# EAGLE board mbhp_dio_matrix_v1 (EAGLE 6.2)
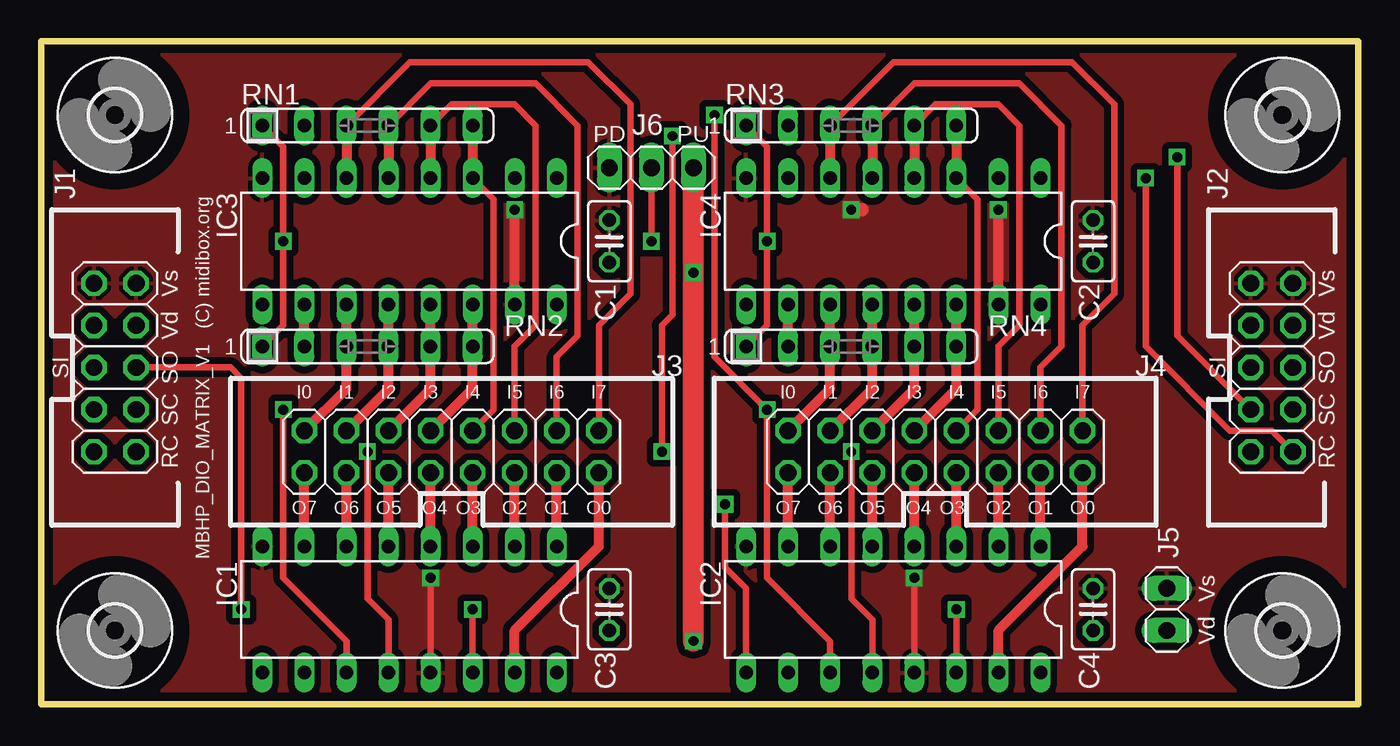
[diagram p0: board, top side]
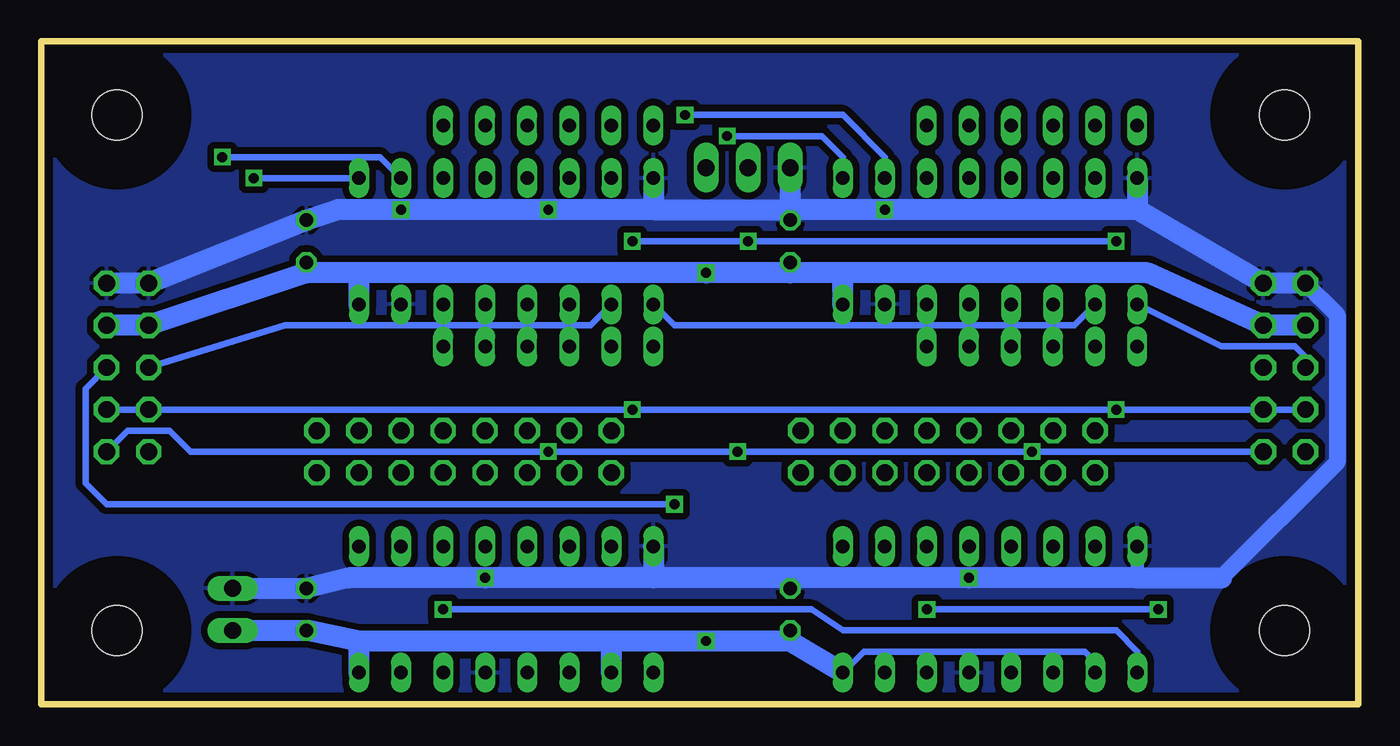
[diagram p1: board, bottom side, seen from below]

Size 79.5 x 40 mm. Coordinates in mm from the lower left corner, seen from the top.
Outline: 0,0 0,40 79.5,40 79.5,0 0,0
Copper layers (1*16): Top 0.035mm / dielectric 1.5mm / Bottom 0.035mm
Design rules: minimum track width 8mil, minimum drill 0.6mm, track to track 8mil, track to pad 8mil, pad to pad 8mil, via to via 8mil, smd to smd 0mil, copper to edge 20mil, drill to drill 10mil, minimum pad ring 8mil, minimum via ring 8mil, stop-mask expansion 0mil, vias tented up to drill 0mil, thermal gap 10mil

## Footprints (pad centres in the part's own frame; a part is rotated, then mirrored left to right if it is on the bottom)
C025-025X050 = drill 0.813 octagon: 1 -1.27,0; 2 1.27,0
3,0 = hole 3: 0,0
DIL16 = drill 0.813 long: 1 -8.89,-3.81; 2 -6.35,-3.81; 3 -3.81,-3.81; 4 -1.27,-3.81; 5 1.27,-3.81; 6 3.81,-3.81; 7 6.35,-3.81; 8 8.89,-3.81; 9 8.89,3.81; 10 6.35,3.81; 11 3.81,3.81; 12 1.27,3.81; 13 -1.27,3.81; 14 -3.81,3.81; 15 -6.35,3.81; 16 -8.89,3.81
2X05 = drill 1.016 octagon: 1 -5.08,-1.27; 2 -5.08,1.27; 3 -2.54,-1.27; 4 -2.54,1.27; 5 0,-1.27; 6 0,1.27; 7 2.54,-1.27; 8 2.54,1.27; 9 5.08,-1.27; 10 5.08,1.27
2X08 = drill 1.016 octagon: 1 -8.89,-1.27; 2 -8.89,1.27; 3 -6.35,-1.27; 4 -6.35,1.27; 5 -3.81,-1.27; 6 -3.81,1.27; 7 -1.27,-1.27; 8 -1.27,1.27; 9 1.27,-1.27; 10 1.27,1.27; 11 3.81,-1.27; 12 3.81,1.27; 13 6.35,-1.27; 14 6.35,1.27; 15 8.89,-1.27; 16 8.89,1.27
1X02 = drill 1.016 long: 1 -1.27,0; 2 1.27,0
1X03 = drill 1.016 long: 1 -2.54,0; 2 0,0; 3 2.54,0
SIL6 = drill 0.813 long: 1 -6.35,0; 2 -3.81,0; 3 -1.27,0; 4 1.27,0; 5 3.81,0; 6 6.35,0

## Placement (x,y rotation side)
C1  100nF  [C025-025X050]  34.29,27.94 90 top
C2  100nF  [C025-025X050]  63.5,27.94 90 top
C3  100nF  [C025-025X050]  34.29,5.71 90 top
C4  100nF  [C025-025X050]  63.5,5.71 90 top
E$1  [3,0]  4.45,35.56 0 top
E$2  [3,0]  74.93,35.56 0 top
E$3  [3,0]  74.93,4.45 0 top
E$4  [3,0]  4.45,4.45 0 top
IC1  74HC595  [DIL16]  22.23,5.71 180 top
IC2  74HC595  [DIL16]  51.44,5.71 180 top
IC3  74HC165  [DIL16]  22.23,27.94 180 top
IC4  74HC165  [DIL16]  51.44,27.94 180 top
J1  [2X05]  4.45,20.32 270 top
J2  [2X05]  74.3,20.32 270 top
J3  [2X08]  24.77,15.24 0 top
J4  [2X08]  53.98,15.24 0 top
J5  [1X02]  67.94,5.71 90 top
J6  [1X03]  36.83,32.38 180 top
RN1  5x10k  [SIL6]  19.68,34.92 0 top
RN2  5x10k  [SIL6]  19.68,21.59 0 top
RN3  5x10k  [SIL6]  48.9,34.92 0 top
RN4  5x10k  [SIL6]  48.9,21.59 0 top

## Library data of the parts
C1-C4 = resistor
E$1-E$4 = holes
IC1-IC4 = 74xx-eu
J1-J6 = pinhead
RN1-RN4 = resistor-sil

## Nets
GND: C1.2 C2.2 C3.2 C4.2 IC1.8 IC1.13 IC2.8 IC2.13 IC3.8 IC3.15 IC4.8 IC4.15 J1.1 J1.2 J2.1 J2.2 J5.2 J6.3
RC: IC1.12 IC2.12 IC3.1 IC4.1 J1.10 J2.10
S$1: J6.2 RN1.1 RN2.1 RN3.1 RN4.1
S$2: IC1.9 IC2.14
S$3: IC3.11 J3.2 RN2.3
S$4: IC3.12 J3.4 RN2.4
S$5: IC3.13 J3.6 RN2.5
S$6: IC3.14 J3.8 RN2.6
S$7: IC3.3 J3.10 RN1.6
S$8: IC3.4 J3.12 RN1.5
S$9: IC3.5 J3.14 RN1.4
S$10: IC3.6 J3.16 RN1.3
S$11: IC4.11 J4.2 RN4.3
S$12: IC4.12 J4.4 RN4.4
S$13: IC4.13 J4.6 RN4.5
S$14: IC4.14 J4.8 RN4.6
S$15: IC4.3 J4.10 RN3.6
S$16: IC4.4 J4.12 RN3.5
S$17: IC4.5 J4.14 RN3.4
S$18: IC4.6 J4.16 RN3.3
S$19: IC3.10 IC4.9 RN2.2
S$20: IC4.10 J2.5 RN4.2
S$24: IC1.7 J3.1
S$25: IC1.6 J3.3
S$26: IC1.5 J3.5
S$27: IC1.4 J3.7
S$28: IC1.3 J3.9
S$29: IC1.2 J3.11
S$30: IC1.1 J3.13
S$31: IC1.15 J3.15
S$32: IC2.7 J4.1
S$33: IC2.6 J4.3
S$34: IC2.5 J4.5
S$35: IC2.4 J4.7
S$36: IC2.3 J4.9
S$37: IC2.2 J4.11
S$38: IC2.1 J4.13
S$39: IC2.15 J4.15
S$42: IC2.9 J2.6
SC: IC1.11 IC2.11 IC3.2 IC4.2 J1.7 J1.8 J2.7 J2.8
SI: IC3.9 J1.5
SO: IC1.14 J1.6
VDD: C1.1 C2.1 C3.1 C4.1 IC1.10 IC1.16 IC2.10 IC2.16 IC3.16 IC4.16 J1.3 J1.4 J2.3 J2.4 J5.1 J6.1

## Tracks (layer width: path | path; a pad name or v marks a point on that pad's centre or on a via)
GND  (via drill 0.6)
  Top 0.406: IC1.13 v23.5,7.62 | IC2.13 v52.7,7.62
  Top 0.61: IC3.15 v28.57,29.84 | IC4.15 v57.78,29.84
  Top 0.813: v48.9,29.84 49.53,29.84
  Bottom 0.813: IC1.8 13.34,7.62
  Bottom 1.016: J1.1 1.27,23.5 1.27,14.61 8.26,7.62
  Bottom 1.27: J1.1 J1.2 13.34,29.84 | IC3.8 13.34,29.84 | 13.34,29.84 v28.57,29.84 34.29,29.84 | J2.2 J2.1 C2.2 61.59,29.84 v57.78,29.84 v48.9,29.84 42.55,29.84 | J6.3 C1.2 34.29,29.84 | 42.55,29.84 34.29,29.84 | 34.29,7.62 v23.5,7.62 13.34,7.62 8.26,7.62 | C3.2 34.29,7.62 | 34.29,7.62 42.55,7.62 | IC2.8 42.55,7.62 | 42.55,7.62 v52.7,7.62 60.96,7.62 C4.2 J5.2 | IC4.8 42.55,29.84
  pour Top (isolate 0.406): 0,40 79.5,40 79.5,0 0,0
  pour Bottom (isolate 0.406): 0,40 79.5,40 79.5,0 0,0
RC  (via drill 0.6)
  Top 0.406: IC1.12 20.95,5.08 19.68,6.35 v19.68,15.24 | IC2.12 50.16,5.08 48.9,6.35 v48.9,15.24 | v38.1,34.29 38.1,23.5 37.47,22.86 v37.47,15.24 | v66.67,31.75 66.67,21.59 71.75,16.51 74.3,16.51 J2.10
  Bottom 0.406: J1.10 v19.68,15.24 v37.47,15.24 v48.9,15.24 70.48,15.24 71.75,16.51 74.3,16.51 J2.10 | IC3.1 31.11,33.02 32.38,34.29 v38.1,34.29 | IC4.1 v66.67,31.75
S$1  (via drill 0.6)
  Top 0.406: RN1.1 14.61,33.66 v14.61,27.94 14.61,22.86 RN2.1 | RN4.1 43.81,22.86 v43.81,27.94 43.81,33.66 RN3.1 | v36.83,27.94 J6.2
  Bottom 0.406: v14.61,27.94 v36.83,27.94 v43.81,27.94
S$2  (via drill 0.6)
  Top 0.406: v55.24,5.71 IC2.14
  Bottom 0.406: v55.24,5.71 33.02,5.71 31.11,4.45 14.61,4.45 13.34,3.17 IC1.9
S$3
  Top 0.61: J3.2 18.41,19.05 RN2.3 IC3.11
S$4
  Top 0.61: J3.4 20.95,19.05 RN2.4 IC3.12
S$5
  Top 0.61: J3.6 23.5,19.05 RN2.5 IC3.13
S$6
  Top 0.61: J3.8 26.04,19.05 RN2.6 IC3.14
S$7
  Top 0.406: J3.10 27.3,17.78 27.3,30.48 IC3.3
  Top 0.61: RN1.6 IC3.3
S$8
  Top 0.406: J3.12 28.57,21.59 29.84,22.86 29.84,34.92 28.57,36.2 24.77,36.2 RN1.5
  Top 0.61: RN1.5 IC3.4
S$9
  Top 0.406: J3.14 31.11,20.95 32.38,22.23 32.38,34.92 29.84,37.47 23.5,37.47 RN1.4
  Top 0.61: RN1.4 IC3.5
S$10
  Top 0.406: J3.16 33.66,22.86 35.56,24.77 35.56,36.2 33.02,38.73 22.23,38.73 RN1.3
  Top 0.61: RN1.3 IC3.6
S$11
  Top 0.61: J4.2 47.62,19.05 RN4.3 IC4.11
S$12
  Top 0.61: J4.4 50.16,19.05 RN4.4 IC4.12
S$13
  Top 0.61: J4.6 52.7,19.05 RN4.5 IC4.13
S$14
  Top 0.61: J4.8 55.24,19.05 RN4.6 IC4.14
S$15
  Top 0.406: J4.10 56.52,17.78 56.52,30.48 IC4.3
  Top 0.61: RN3.6 IC4.3
S$16
  Top 0.406: J4.12 57.78,21.59 59.05,22.86 59.05,34.92 57.78,36.2 53.98,36.2 RN3.5
  Top 0.61: RN3.5 IC4.4
S$17
  Top 0.406: J4.14 60.33,20.32 61.59,21.59 61.59,34.92 59.05,37.47 52.7,37.47 RN3.4
  Top 0.61: RN3.4 IC4.5
S$18
  Top 0.406: J4.16 62.87,22.86 64.77,24.77 64.77,36.2 62.23,38.73 51.44,38.73 RN3.3
  Top 0.61: RN3.3 IC4.6
S$19
  Top 0.61: RN2.2 IC3.10
  Bottom 0.406: IC4.9 41.27,22.86 17.14,22.86 IC3.10
S$20
  Top 0.61: RN4.2 IC4.10
  Bottom 0.406: J2.5 64.77,22.86 46.35,22.86 IC4.10
S$24
  Top 0.61: IC1.7 J3.1
S$25
  Top 0.61: IC1.6 J3.3
S$26
  Top 0.61: IC1.5 J3.5
S$27
  Top 0.61: IC1.4 J3.7
S$28
  Top 0.61: IC1.3 J3.9
S$29
  Top 0.61: IC1.2 J3.11
S$30
  Top 0.61: IC1.1 J3.13
S$31
  Top 0.61: IC1.15 28.57,4.45 33.66,9.53 J3.15
S$32
  Top 0.61: IC2.7 J4.1
S$33
  Top 0.61: IC2.6 J4.3
S$34
  Top 0.61: IC2.5 J4.5
S$35
  Top 0.61: IC2.4 J4.7
S$36
  Top 0.61: IC2.3 J4.9
S$37
  Top 0.61: IC2.2 J4.11
S$38
  Top 0.61: IC2.1 J4.13
S$39
  Top 0.61: IC2.15 57.78,4.45 62.87,9.53 J4.15
S$42  (via drill 0.6)
  Top 0.406: IC2.9 42.55,6.99 41.27,8.26 v41.27,12.06
  Bottom 0.406: v41.27,12.06 75.56,12.06 76.83,13.34 76.83,19.05 J2.6
SC  (via drill 0.6)
  Top 0.406: IC1.11 18.41,3.81 14.61,7.62 v14.61,17.78 | IC2.11 47.62,3.81 43.81,7.62 v43.81,17.78 40.64,20.95 v40.64,35.56 | v68.58,33.02 68.58,22.23 J2.7
  Bottom 0.406: J2.8 J2.7 v43.81,17.78 v14.61,17.78 J1.8 J1.7 | IC3.2 28.57,33.02 31.11,35.56 v40.64,35.56 | IC4.2 59.05,33.02 v68.58,33.02
SI
  Bottom 0.406: J1.5 3.17,20.95 3.81,21.59 8.26,21.59 IC3.9
SO  (via drill 0.6)
  Top 0.406: IC1.14 v26.04,5.71 | v12.06,5.71 12.06,19.68 11.43,20.32 J1.6
  Bottom 0.406: v26.04,5.71 v12.06,5.71
VDD  (via drill 0.6)
  Top 1.27: v39.37,3.81 v39.37,26.04 J6.1
  Bottom 0.406: IC1.10 15.88,2.54 16.51,3.17 29.84,3.17 IC1.16
  Bottom 1.27: J1.3 J1.4 12.7,26.04 31.11,26.04 | 31.11,26.04 34.29,26.04 | C1.1 34.29,26.04 | 34.29,26.04 v39.37,26.04 60.33,26.04 | 60.33,26.04 63.5,26.04 | C2.1 63.5,26.04 | 63.5,26.04 J2.3 J2.4 | IC4.16 60.33,26.04 | IC3.16 31.11,26.04 | 45.09,3.81 v39.37,3.81 34.29,3.81 | 45.09,3.81 60.33,3.81 | 60.33,3.81 C4.1 J5.1 | IC2.10 45.09,3.81 | IC2.16 60.33,3.81 | IC1.16 34.29,3.81 | C3.1 34.29,3.81

## Text on the board
tNames: PD | PU | (C) midibox.org | Vs | Vs | Vd | Vd | SI | SO | SI | SO | SC | I0 | I1 | I2 | I3 | I4 | I5 | I6 | I7 | I0 | I1 | I2 | I3 | I4 | I5 | I6 | I7 | SC | RC | MBHP_DIO_MATRIX_V1 | RC | O7 | O6 | O5 | O4 | O3 | O2 | O1 | O0 | O7 | O6 | O5 | O4 | O3 | O2 | O1 | O0 | Vs | Vd